# Altium PCB LMT87 Card.PcbDoc
Units mm, origin at the board's own origin, x right, y up, seen from the top; angles counter-clockwise.
Board outline 60 x 25 mm, 2 copper layers (Top Layer, Bottom Layer), stack 1.621 mm thick; 8 components, 15 nets, 92 pads, 26 vias.
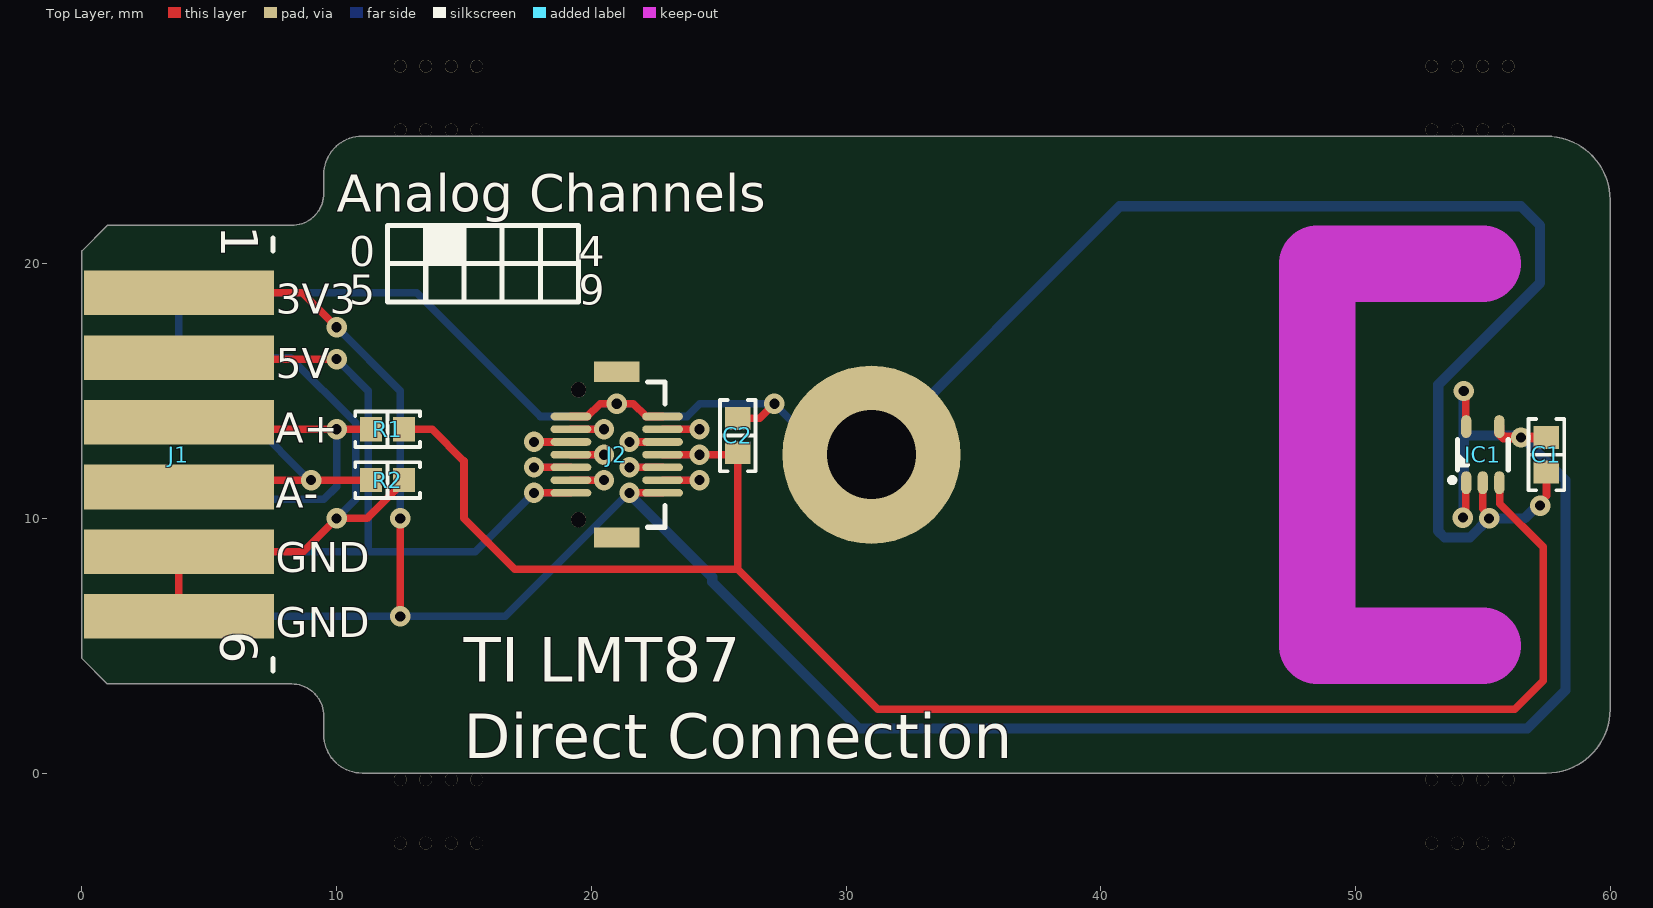
[diagram p0: Top Layer view]
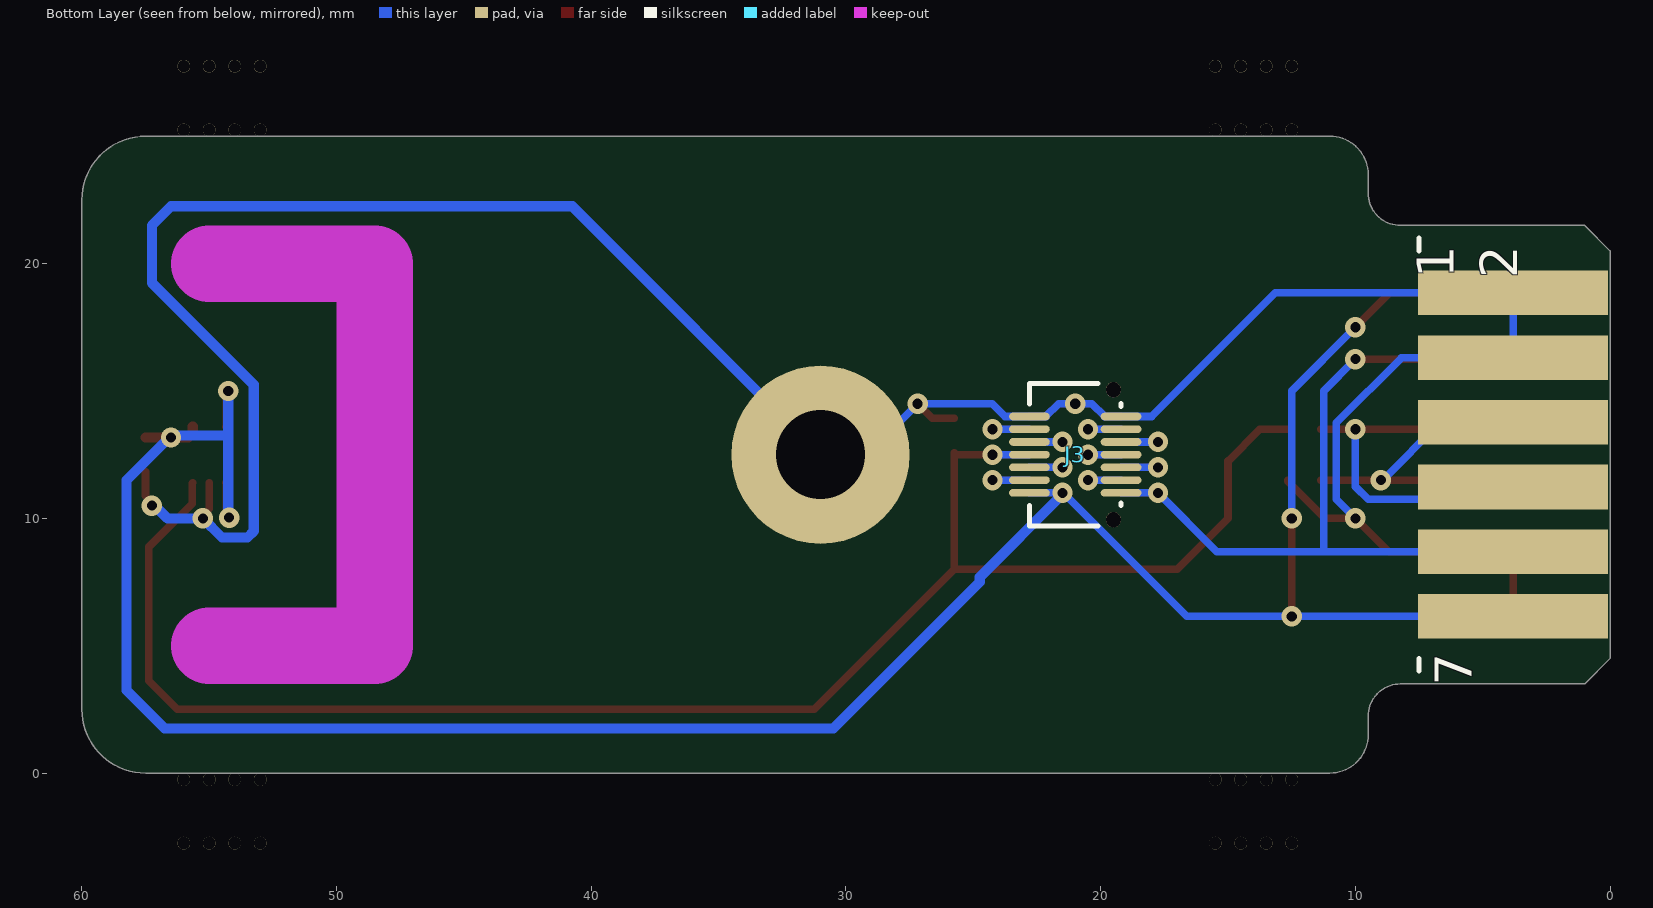
[diagram p1: Bottom Layer view, seen from below]
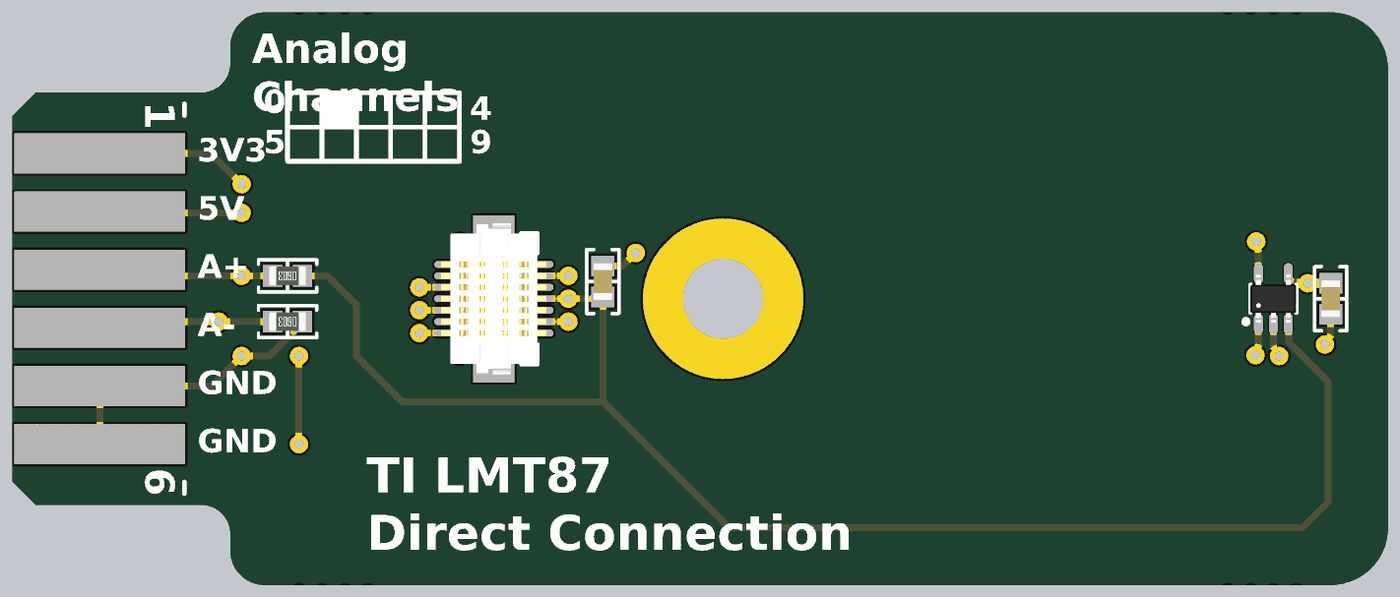
[diagram p2: 3D render of the assembled board from above, using the file's embedded part models]

## Layer stack, top to bottom
Top Solder: solder mask 0.0102, Solder Resist, Dk 3.5
Top Layer: signal copper 0.0356
Dielectric1: core 1.55, FR-4, Dk 4.8
Bottom Layer: signal copper 0.0356
Bottom Solder: solder mask 0.0102, Solder Resist, Dk 3.5

## Board outline
0,4.5 1,3.5 8.23,3.5 cw(c8.23,2.23) 9.5,2.23 9.5,1.5 ccw(c11,1.5) 11,0 57.5,0 ccw(c57.5,2.5) 60,2.5 60,22.5 ccw(c57.5,22.5) 57.5,25 11,25 ccw(c11,23.5) 9.5,23.5 9.5,22.77 cw(c8.23,22.77) 8.23,21.5 1,21.5 0,20.5

## Design rules (kind name [scope] priority, off if disabled: settings)
Clearance PadClearance [IsPad vs IsPad] p1: gap=0.15 ignorepadtopadclearanceinfootprint=FALSE
Clearance [All] p2: gap=0.15 ignorepadtopadclearanceinfootprint=FALSE
HoleSize [All] p1: absolutevalues=TRUE maxlimit=6 minlimit=0.4 maxpercent=80.000 minpercent=20.000
HoleToHoleClearance [All] p1: gap=0.2 allowstackedmicrovias=TRUE
MinimumSolderMaskSliver [All] p1: minsoldermaskwidth=0
PolygonConnect ViaConnect [IsVia] p1: connectstyle=Direct reliefconductorwidth=0.254 reliefentries=4 polygonreliefangle="90 Angle" airgapwidth=0.254
PolygonConnect [All] p2: connectstyle=Direct reliefconductorwidth=0.3 reliefentries=4 polygonreliefangle="90 Angle" airgapwidth=0.254
RoutingVias [All] p1: holewidth=0.6 width=1 viastyle="Through Hole" minholewidth=0.4 minwidth=0.8 maxholewidth=5 maxwidth=6
SilkToSilkClearance [All] p1: silktosilkclearance=0
SilkToSolderMaskClearance SilkscreenOverComponentPads [IsPad] p1: minsilkscreentomaskgap=0.05 clearancetoexposedcopper=TRUE
SolderMaskExpansion "Via Tenting" [IsVia] p1: expansion=-2 istentingtop=FALSE
SolderMaskExpansion [All] p2: expansion=0.102 istentingtop=FALSE
Width [All] p1: maxlimit=2 minlimit=0.2 preferedwidth=0.4
25 further rules are at their usual default settings.

## Components (designator, comment, footprint, x,y, rotation, side; value= is the part's Value field where it differs from the comment)
C1 "0.1µF" "CAP 0603_1608" 57.5,12.5 r270 top
C2 "10000pF" "CAP 0603_1608" 25.75,13.25 r270 top
IC1 "LMT87DCKT" "TI SC-70-5 DCK" 55,12.5 r0 top
J1 "12 Pin Dual Row" "TE 5650118-3 Card Edge" 0,12.5 r270 top
J2 "DF12(3.0)-14DP-0.5V(86)" "HIROSE DF12 3.0-14DP-0.5V 86" 21,12.5 r90 top
J3 "DF12A(3.0)-14DS-0.5V(81)" "HIROSE DF12A 3.0-14DS-0.5V 81" 21,12.5 r270 bottom
R1 "0 Ohms" "RES 0603_1608" 12,13.5 r180 top
R2 "0 Ohms" "RES 0603_1608" 12,11.5 r180 top

## Footprints (in the part's own frame and the unit in brackets; to place one, negate y for a bottom-side part, rotate by r counter-clockwise, add the part's x,y. Pads: shape width x height; smd on the part's side, far side on the other; paste and mask are expansions set on the pad)
"CAP 0603_1608" [mm] "Chip Capacitor, 2-Leads, Body 1.60x0.80mm, IPC Medium Density"
  rect 0.9x1 smd: 1(-0.675,0) 2(0.675,0)
  silkscreen extent -1.4,-0.7 1.4,0.7, body extent -0.8,-0.41 0.8,0.41, height 0.82
"HIROSE DF12 3.0-14DP-0.5V 86" [mm] "14 Position Connector Header, 0.50mm Pitch,5.7x3.8mm Body"
  oval 0.3x1.6 smd: 1(-1.5,-1.8) 2(-1,-1.8) 3(-0.5,-1.8) 4(0,-1.8) 5(0.5,-1.8) 6(1,-1.8) 7(1.5,-1.8) 8(1.5,1.8) 9(1,1.8) 10(0.5,1.8) 11(0,1.8) 12(-0.5,1.8) 13(-1,1.8) 14(-1.5,1.8)
  round 0.6 hole 0.6 unplated: B(-2.55,1.5) B(2.55,1.5)
  rect 0.8x1.8 smd: M(-3.25,0) M(3.25,0)
  silkscreen extent -2.85,-1.9 2.85,-1.2, body extent -3.3,-2.3 3.3,2.3, height 2.3
"HIROSE DF12A 3.0-14DS-0.5V 81" [mm] "14 Position Connector Receptacle, 0.50mm Pitch,5.60x3.60mm Body"
  oval 0.3x1.6 smd: 1(1.5,-1.8) 2(1,-1.8) 3(0.5,-1.8) 4(0,-1.8) 5(-0.5,-1.8) 6(-1,-1.8) 7(-1.5,-1.8) 8(-1.5,1.8) 9(-1,1.8) 10(-0.5,1.8) 11(0,1.8) 12(0.5,1.8) 13(1,1.8) 14(1.5,1.8)
  round 0.6 hole 0.6 unplated: B(-2.55,1.5) B(2.55,1.5)
  silkscreen extent -2.8,-1.8 2.8,1.8, body extent -2.8,-2.3 2.8,2.3, height 2.2
"RES 0603_1608" [mm] "Chip Resistor, 2-Leads, Body 1.60x0.80mm, IPC Medium Density"
  rect 0.85x0.95 smd: 1(-0.65,0) 2(0.65,0)
  silkscreen extent -1.27,-0.7 1.27,0.7, body extent -0.8,-0.4 0.8,0.4, height 0.45
"TE 5650118-3 Card Edge" [mm] "Card Edge contacts for TE Connector"
  rect 1.75x7.46 smd: 1(-6.35,3.81) 2(-3.81,3.81) 3(-1.27,3.81) 4(1.27,3.81) 5(3.81,3.81) 6(6.35,3.81)
  rect 1.75x7.46 smd far side: 7(6.35,3.81) 8(3.81,3.81) 9(1.27,3.81) 10(-1.27,3.81) 11(-3.81,3.81) 12(-6.35,3.81)
  silkscreen extent -8.5,7.5 8.5,7.5
"TI SC-70-5 DCK" [mm] "Temperature Sensor Analog - Local -50°C ~ 150°C 13.6mV, 5 Leads, Body 2.1x2mm, Pitch 0.65mm, Package SOT-353"
  oval 0.4x0.9 smd mask+0.05: 1(-0.65,-1.1) 2(0,-1.1) 3(0.65,-1.1) 4(0.65,1.1) 5(-0.65,1.1)
  silkscreen extent -1.3,-1.1 1,0.6, body extent -1,-1.05 1,1.05, height 1.1

## Part data
C1: library part CC0603ZRY5V7BB104, "CAP CER 0.1UF 16V Y5V 0603", Device Package="0603 (1608 Metric)", Manufacturer=Yageo, Operating Temperature="-30°C ~ 85°C", Supplier Part Number 1=311-1369-1-ND, Temperature Coefficient="Y5V (F)", Tolerance="-20%, +80%", Voltage - Rated=16V, Applications="General Purpose", Capacitance=0.1µF, ComponentLink1Description=Datasheet, ComponentLink1URL=http://www.yageo.com/documents/recent/UPY-GPHC_Y5V_6.3V-to-50V_8.pdf, ComponentLink2Description="DigiKey Link", ComponentLink2URL=http://digikey.com/product-detail/en/yageo/CC0603ZRY5V7BB104/311-1369-1-ND/2103153, LastUpdated="21/01/2020 00:01:38", Lifecycle Status=Active, Minimum Order=1, Mounting Type="Surface Mount, MLCC", Package / Case="0603 (1608 Metric)", Packaging=TapeAndReel, Part Number=CC0603ZRY5V7BB104, Part Status=Active, PartId=17881, Price=0.01, Series=CC, Size / Dimension="0.063\" L x 0.031\" W (1.60mm x 0.80mm)", Supplier 1=DigiKey, Thickness (Max)="0.035\" (0.90mm)"
C2: library part AC0603KPX7R9BB103, "CAP CER 10000PF 50V X7R 0603", Device Package="0603 (1608 Metric)", Manufacturer=Yageo, Operating Temperature="-55°C ~ 125°C", Ratings=AEC-Q200, Supplier Part Number 1=311-3284-1-ND, Temperature Coefficient=X7R, Tolerance=±10%, Voltage - Rated=50V, Applications=Automotive, Capacitance=10000pF, ComponentLink1Description=Datasheet, ComponentLink1URL=http://www.yageo.com/NewPortal/_en/search/productDocs.jsp?YageoPartNumber=AC0603KPX7R9BB103, ComponentLink2Description="DigiKey Link", ComponentLink2URL=http://digikey.com/product-detail/en/yageo/AC0603KPX7R9BB103/311-3284-1-ND/6643536, LastUpdated="02/09/2020 01:03:31", Lifecycle Status=Active, Minimum Order=1, Mounting Type="Surface Mount, MLCC", Package / Case="0603 (1608 Metric)", Packaging=TapeAndReel, Part Number=AC0603KPX7R9BB103, Part Status=Active, PartId=5188, Price=0.01, Series=AC, Size / Dimension="0.063\" L x 0.031\" W (1.60mm x 0.80mm)", Supplier 1=DigiKey, Thickness (Max)="0.035\" (0.90mm)"
IC1: "SENSOR ANALOG -50C-150C SC70-5", Device Package="5-TSSOP, SC-70-5, SOT-353", Manufacturer="Texas Instruments", Operating Temperature="-50°C ~ 150°C", Supplier Device Package=SC-70-5, Supplier Part Number 1=296-35730-1-ND, Voltage - Supply="2.7V ~ 5.5V", Accuracy - Highest (Lowest)=±2.7°C, ComponentLink1Description=Datasheet, ComponentLink1URL=http://www.ti.com/general/docs/suppproductinfo.tsp?distId=10&gotoUrl=http%3A%2F%2Fwww.ti.com%2Flit%2Fgpn%2Flmt87, ComponentLink2Description="DigiKey Link", ComponentLink2URL=http://digikey.com/product-detail/en/texas-instruments/LMT87DCKT/296-35730-1-ND/3987165, LastUpdated="25/05/2020 18:04:19", Lifecycle Status=Active, Minimum Order=1, Mounting Type="Surface Mount", Output Type="Analog Voltage", Package / Case="5-TSSOP, SC-70-5, SOT-353", Packaging=TapeAndReel, Part Number=LMT87DCKT, Part Status=Active, Price=0.36, Resolution=13.6mV/°C, Sensing Temperature - Local="-50°C ~ 150°C", Sensor Type="Analog, Local", Series=-, Supplier 1=DigiKey, Test Condition="70°C ~ 150°C"
J2: "CONN HDR 14POS SMD GOLD", Manufacturer="Hirose Electric Co Ltd", Supplier Part Number 1=H11701CT-ND, ComponentLink1Description=Datasheet, ComponentLink1URL=https://www.hirose.com/product/download/?distributor=digikey&type=specSheet&lang=en&num=DF12(3.0)-14DP-0.5V(86), ComponentLink2Description="DigiKey Link", ComponentLink2URL=http://digikey.com/product-detail/en/hirose-electric-co-ltd/DF12-3.0-14DP-0.5V-86/H11701CT-ND/2172493, Connector Type="Header, Outer Shroud Contacts", Contact Finish=Gold, Contact Finish Thickness="8.00µin (0.203µm)", Features="Board Guide, Solder Retention", Height Above Board="0.091\" (2.30mm)", LastUpdated="06/08/2020 22:47:47", Lifecycle Status=Active, Mated Stacking Heights=3mm, Minimum Order=1, Mounting Type="Surface Mount", Number of Positions=14, Number of Rows=2, Packaging=TapeAndReel, Part Number=DF12(3.0)-14DP-0.5V(86), Part Status=Active, Pitch="0.020\" (0.50mm)", Price=0.38, Series=DF12, Supplier 1=DigiKey
J3: "CONN RCPT 14POS SMD GOLD", Manufacturer="Hirose Electric Co Ltd", Supplier Part Number 1=H11713CT-ND, ComponentLink1Description=Datasheet, ComponentLink1URL=https://www.hirose.com/product/document?clcode=CL0537-0721-0-86&productname=DF12(3.0)-10DP-0.5V(86)&series=DF12&documenttype=Catalog&lang=en&documentid=D31693_en, ComponentLink2Description="DigiKey Link", ComponentLink2URL=http://digikey.com/product-detail/en/hirose-electric-co-ltd/DF12A-3.0-14DS-0.5V-81/H11713CT-ND/2172505, Connector Type="Receptacle, Center Strip Contacts", Contact Finish=Gold, Contact Finish Thickness="8.00µin (0.203µm)", Features="Board Guide", Height Above Board="0.087\" (2.20mm)", LastUpdated="06/08/2020 22:48:47", Lifecycle Status=Active, Mated Stacking Heights=3mm, Minimum Order=1, Mounting Type="Surface Mount", Number of Positions=14, Number of Rows=2, Packaging=TapeAndReel, Part Number=DF12A(3.0)-14DS-0.5V(81), Part Status=Active, Pitch="0.020\" (0.50mm)", Price=0.36, Series=DF12, Supplier 1=DigiKey
R1 R2: library part ERJ-3GEY0R00V, "RES SMD 0 OHM JUMPER 1/10W 0603", Device Package="0603 (1608 Metric)", Manufacturer="Panasonic Electronic Components", Operating Temperature="-55°C ~ 155°C", Power (Watts)="0.1W, 1/10W", Ratings=AEC-Q200, Supplier Device Package=0603, Supplier Part Number 1=P0.0GCT-ND, Tolerance=Jumper, ComponentLink1Description=Datasheet, ComponentLink1URL=http://industrial.panasonic.com/www-cgi/jvcr13pz.cgi?E+PZ+3+AOA0001+ERJ3GEY0R00V+7+WW, ComponentLink2Description="DigiKey Link", ComponentLink2URL=http://digikey.com/product-detail/en/panasonic-electronic-components/ERJ-3GEY0R00V/P0.0GCT-ND/134711, Composition="Thick Film", Features="Automotive AEC-Q200", Height - Seated (Max)="0.022\" (0.55mm)", LastUpdated="13/08/2020 10:36:40", Lifecycle Status=Active, Minimum Order=1, Number of Terminations=2, Package / Case="0603 (1608 Metric)", Packaging=CutTape, Part Number=ERJ-3GEY0R00V, Part Status=Active, PartId=22603, Price=0.10, Resistance="0 Ohms", Series=ERJ, Size / Dimension="0.063\" L x 0.031\" W (1.60mm x 0.80mm)", Supplier 1=DigiKey

## Free pads (board coordinates)
  round 7 hole 3.5: M(31,12.5)
  round 0.5 hole 0.5 unplated: N(12.5,-2.75) N(12.5,-0.25) N(12.5,25.25) N(12.5,27.75) N(13.5,-2.75) N(13.5,-0.25) N(13.5,25.25) N(13.5,27.75) N(14.5,-2.75) N(14.5,-0.25) N(14.5,25.25) N(14.5,27.75) N(15.5,-2.75) N(15.5,-0.25) N(15.5,25.25) N(15.5,27.75) N(53,-2.75) N(53,-0.25) N(53,25.25) N(53,27.75) N(54,-2.75) N(54,-0.25) N(54,25.25) N(54,27.75) N(55,-2.75) N(55,-0.25) N(55,25.25) N(55,27.75) N(56,-2.75) N(56,-0.25) N(56,25.25) N(56,27.75)

## Via types
v1: diameter 0.8, hole 0.4, Top Layer to Bottom Layer, 26 vias

## Nets (pads, with @x,y where several pads share a name; then routed paths per layer and width w, separated by ;. In a path a pad name is that pad's centre, name@x,y a point inside that pad or via, vN(x,y) a via of type N, cw(c..) or ccw(c..) an arc to the next point about the centre after c; other vN are vias at no path point)
3V3: C1.1 IC1.1 IC1.4 IC1.5 J1.1 J1.7 J2.1 J3.1 | length 105.8
  Top Layer w0.3: J1.1 8.65,18.85 v1(10,17.5) ; v1(12.5,6.15) v1(12.5,10) ; v1(21.5,11) J2.1 ; v1(54.22,10.03) 54.331,10.142 54.331,11.381 IC1.1 ; v1(54.25,15) 54.331,14.919 54.331,13.619 IC1.5
  Top Layer w0.4: IC1.4 55.65,13.35 55.825,13.175 v1(56.5,13.175) C1.1
  Bottom Layer w0.3: J1.7 v1(12.5,6.15) 16.619,6.15 21.469,11 v1(21.5,11) J3.1 ; v1(10,17.5) 12.5,15 v1(12.5,10)
  Bottom Layer w0.4: v1(21.5,11) 21.5,10.943 24.75,7.693 24.75,7.5 30.5,1.75 56.75,1.75 58.25,3.25 58.25,11.5 56.575,13.175 v1(56.5,13.175) 56.425,13.25 54.25,13.25 ; v1(54.22,10.03) 54.25,10.061 54.25,13.25 ; v1(54.25,15) 54.25,13.25
5V: J1.2 J1.8 J2.14 J3.14 | length 31.8
  Top Layer w0.3: J1.2 3.87,16.25 v1(10,16.25) ; v1(17.75,11) J2.14
  Bottom Layer w0.3: J1.8 11.25,8.69 ; v1(10,16.25) 11.25,15 11.25,8.69 ; v1(17.75,11) 15.44,8.69 11.25,8.69 ; v1@18,11 J3.14
AD0: J2.2 J3.2 | length 2.9
  Top Layer w0.3: J2.2 v1(24.25,11.5)
  Bottom Layer w0.3: J3.2 v1(24.25,11.5)
AD1: J2.3 J3.3 | length 2.6
  Top Layer w0.3: v1(21.5,12) J2.3
  Bottom Layer w0.3: v1(21.5,12) J3.3
AD2: C2.2 IC1.3 J2.4 J3.4 R1.1 | length 68.6
  Top Layer w0.3: R1.1 13.75,13.5 15,12.25 15,10 17,8 25.75,8 ; J2.4 v1(24.25,12.5) 25.675,12.5 C2.2 25.75,8 ; IC1.3 55.669,11.381 55.669,10.581 57.376,8.874 57.376,3.626 56.25,2.5 31.25,2.5 25.75,8
  Bottom Layer w0.3: J3.4 v1(24.25,12.5)
AD3: J2.5 J3.5 | length 2.6
  Top Layer w0.3: v1(21.5,13) J2.5
  Bottom Layer w0.3: v1(21.5,13) J3.5
AD4: J2.6 J3.6 | length 2.9
  Top Layer w0.3: J2.6 v1(24.25,13.5)
  Bottom Layer w0.3: J3.6 v1(24.25,13.5)
AD5: J2.13 J3.13 | length 2.6
  Top Layer w0.3: J2.13 v1(20.5,11.5)
  Bottom Layer w0.3: J3.13 v1(20.5,11.5)
AD6: J2.12 J3.12 | length 2.9
  Top Layer w0.3: v1(17.75,12) J2.12
  Bottom Layer w0.3: v1(17.75,12) J3.12
AD7: J2.11 J3.11 | length 2.6
  Top Layer w0.3: J2.11 v1(20.5,12.5)
  Bottom Layer w0.3: J3.11 v1(20.5,12.5)
AD8: J2.10 J3.10 | length 2.9
  Top Layer w0.3: v1(17.75,13) J2.10
  Bottom Layer w0.3: v1(17.75,13) J3.10
AD9: J2.9 J3.9 | length 2.6
  Top Layer w0.3: J2.9 v1(20.5,13.5)
  Bottom Layer w0.3: J3.9 v1(20.5,13.5)
AN_N: J1.4 J1.10 R2.2 | length 13.8
  Top Layer w0.3: J1.4 4.08,11.5 v1(9,11.5) R2.2
  Bottom Layer w0.3: J1.10 6.665,13.77 8.935,11.5 v1(9,11.5)
AN_P: J1.3 J1.9 R1.2 | length 16.5
  Top Layer w0.3: J1.3 4.08,13.5 v1(10,13.5) R1.2
  Bottom Layer w0.3: J1.9 4.29,10.75 9.5,10.75 10,11.25 v1(10,13.5)
GND: C1.2 C2.1 IC1.2 J1.5 J1.6 J1.11 J1.12 J2.7 J2.8 J3.7 J3.8 pad.M R2.1 | length 114.3
  Top Layer w0.3: J1.6 J1.5 8.69,8.69 v1(10,10) 11.2,10 12.65,11.45 R2.1 ; J2.8 19.85,14 20.35,14.5 v1(21,14.5) 21.65,14.5 22.15,14 J2.7 ; C2.1 26.612,13.925 v1(27.187,14.5) ; 55,10.385 IC1.2 ; 57.5,10.885 C1.2
  Bottom Layer w0.3: v1(10,10) 10.75,10.75 10.75,13.75 8.19,16.31 J1.11 J1.12 13.15,18.85 18,14 J3.8 19.85,14 20.35,14.5 v1(21,14.5) 21.65,14.5 22.15,14 J3.7 23.76,14 24.26,14.5 v1(27.187,14.5) 29.187,12.5 pad.M
  Bottom Layer w0.4: pad.M 40.75,22.25 56.5,22.25 57.25,21.5 57.25,19.25 53.25,15.25 53.25,9.5 53.5,9.25 54.5,9.25 v1(55.25,10) 56.642,10 57.142,10.5 v1(57.25,10.5)
pads on no net: J2.B J2.M J3.B

## Keep-outs
Keep-Out Layer:
  lines w3: 55,5 48.5,5 48.5,20 55,20

## Silkscreen, mask and mechanical layers (free items; w line width, h text height)
Top Overlay:
  rectangle: 13.5,20 15,21.5
  region: 13.5,21.5
  lines w0.2: 12,20 12,18.5 13.5,18.5 ; 12,20 12,21.5 13.5,21.5 ; 12,20 13.5,20 ; 13.5,18.5 15,18.5 ; 13.5,18.5 13.5,20 ; 13.5,20 15,20 ; 13.5,20 13.5,21.5 ; 13.5,21.5 15,21.5 ; 15,18.5 16.5,18.5 ; 15,18.5 15,20 ; 15,20 16.5,20 ; 15,20 15,21.5 ; 15,21.5 16.5,21.5 ; 16.5,18.5 18,18.5 ; 16.5,18.5 16.5,20 ; 16.5,20 18,20 ; 16.5,20 16.5,21.5 ; 16.5,21.5 18,21.5 ; 18,18.5 19.5,18.5 19.5,20 ; 18,18.5 18,20 ; 18,20 19.5,20 ; 18,20 18,21.5 ; 18,21.5 19.5,21.5 19.5,20
  text "Analog Channels" at 10,21.546 h2.5
  text "0" at 10.5,19.5 h2
  text "4" at 19.5,19.5 h2
  text "5" at 10.5,18 h2
  text "9" at 19.5,18 h2
  text "3V3" at 7.62,17.647 h2
  text "5V" at 7.62,15.107 h2
  text "A+" at 7.62,12.567 h2
  text "A-" at 7.62,10.027 h2
  text "GND" at 7.62,7.485 h2
  text "GND" at 7.62,4.945 h2
  text "TI LMT87 / Direct Connection" at 15,0 h3
Bottom Overlay:
  text "Analog Temperature Sensor Card" at 38,0 h5
Outlines:
  the board outline again, w0.2
Route Tool Path:
  lines w3: 11,-1.5 cw(c11,1.5) 8,1.5 8,2 1,2 ; 11,26.5 ccw(c11,23.5) 8,23.5 8,23 1,23 ; 17,-1.5 51.5,-1.5 ; 17,26.5 51.5,26.5 ; 55,5 48.5,5 48.5,20 55,20 ; 57.5,-1.5 ccw(c57.5,2.5) 61.5,2.5 61.5,22.5 ccw(c57.5,22.5) 57.5,26.5 ; -1.5,4.5 ccw(c0,4.5) -1.061,3.439 ; -1.5,4.5 ccw(c0,4.5) -1.061,3.439 ; -1.5,4.5 -1.5,20.5 ; -1.5,20.5 cw(c0,20.5) -1.061,21.561 ; -1.5,20.5 cw(c0,20.5) -1.061,21.561 ; -1.061,3.439 -0.061,2.439 ; -1.061,21.561 -0.061,22.561 ; -0.061,2.439 ccw(c1,3.5) 1,2 ; -0.061,2.439 ccw(c1,3.5) 1,2 ; -0.061,22.561 cw(c1,21.5) 1,23 ; -0.061,22.561 cw(c1,21.5) 1,23

## Text inside footprints (layer, text, board x,y; h text height)
J1: Top Overlay "6" at 4.936,5.576 h2.5 r270; Top Overlay "1" at 4.991,21.498 h2.5 r270; Bottom Overlay "1 / 2" at 3.155,19.424 h2.5 r270; Bottom Overlay "7" at 4.936,3.424 h2.5 r270